# EAGLE board FM-Radio-Receiver-1.5V (EAGLE 7.2.0)
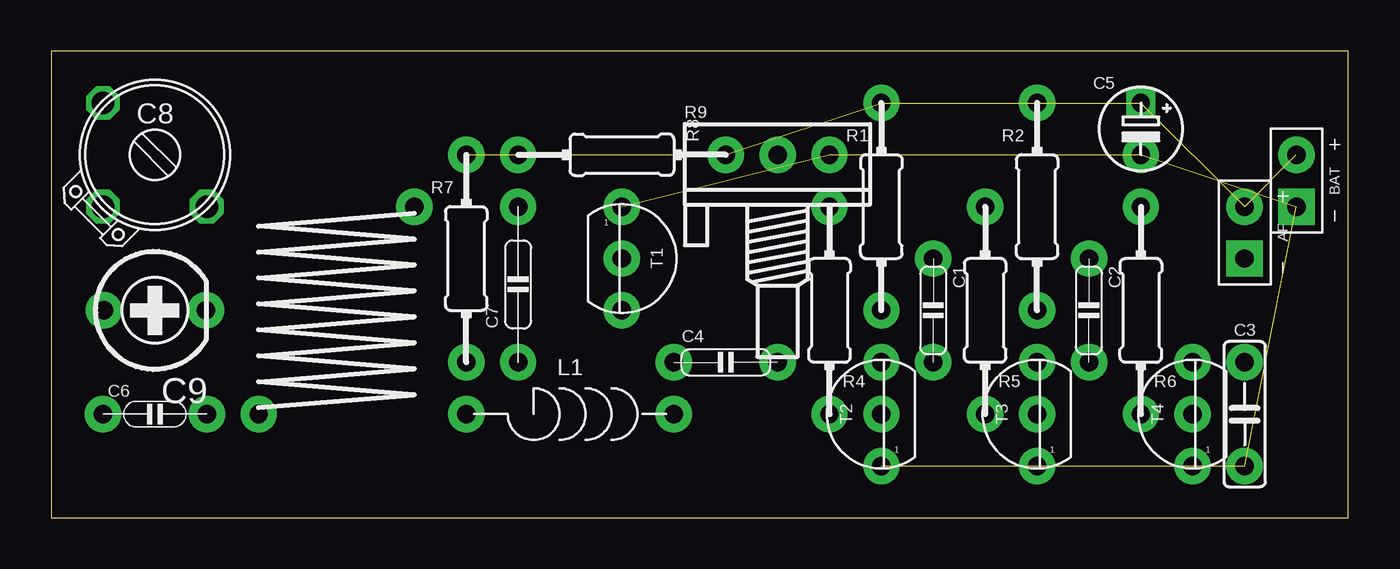
[diagram p0: board, top side]
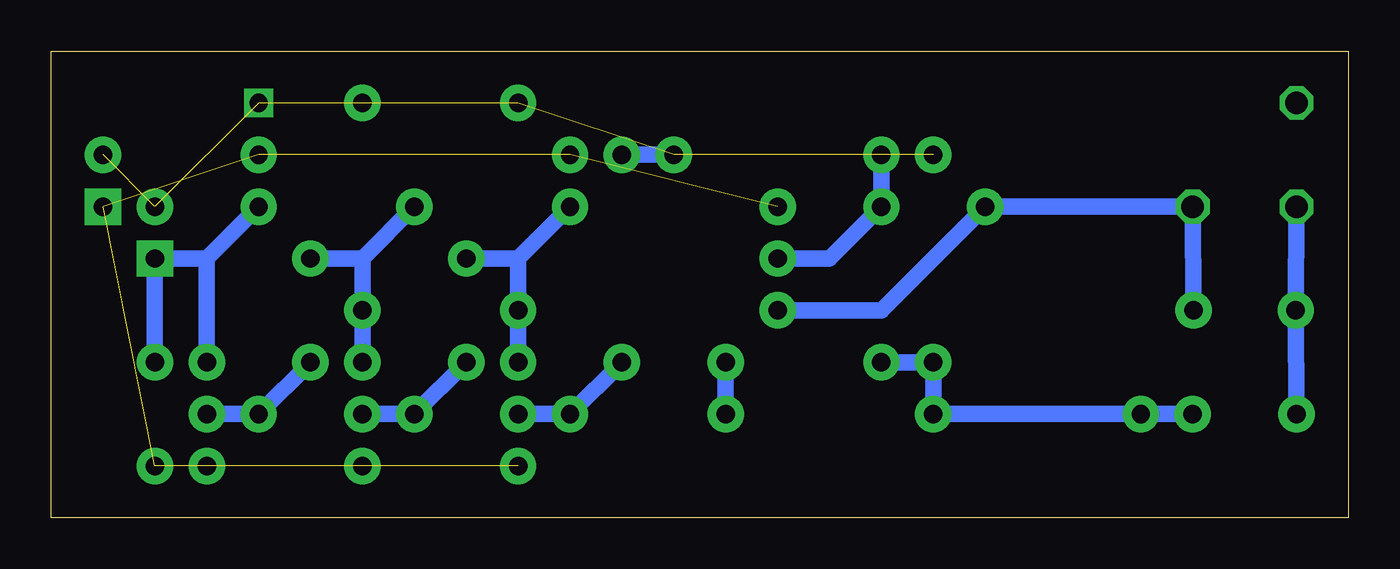
[diagram p1: board, bottom side, seen from below]

Size 63.5 x 22.86 mm. Coordinates in mm from the lower left corner, seen from the top.
Outline: 0,0 63.5,0 63.5,22.86 0,22.86 0,0
Copper layers (1*16): Top 0.035mm / dielectric 1.5mm / Bottom 0.035mm
Design rules "default": minimum track width 10mil, minimum drill 24mil, track to track 8mil, track to pad 8mil, pad to pad 8mil, via to via 8mil, smd to smd 8mil, copper to edge 40mil, drill to drill 8mil, minimum pad ring 10mil, minimum via ring 8mil, stop-mask expansion 4mil, vias tented up to drill 0mil, thermal gap 10mil

## Footprints (pad centres in the part's own frame; a part is rotated, then mirrored left to right if it is on the bottom)
SPAD+- = drill 0.9 pad 1.778 square: 1 0,-1.27 | drill 0.9 pad 1.778: 2 0,1.27
C050-020X044 = drill 0.9 pad 1.778: 1 -2.54,0; 2 2.54,0
C050-025X060 = drill 0.9 pad 1.778: 1 0,2.54; 2 0,-2.54
E2.5-4/V = drill 0.9 square: + 0,1.27 | drill 0.9 pad 1.778: - 0,-1.27
C050-020X036 = drill 0.9 pad 1.778: 1 -2.54,0; 2 2.54,0
C075-020X044 = drill 0.9 pad 1.778: 1 -2.54,0; 2 5.08,0
TRIM-2222-808 = drill 1.1 octagon: 1 -2.54,2.54; 2 -2.54,-2.54; 3 2.54,-2.54
CTRIMTZ03 = drill 0.9 pad 1.778: 1 0,2.5; 2 0,-2.5
L-03/10 = drill 0.9 pad 1.778: 1 5.08,0; 2 -5.08,0
L-10/10Y = drill 0.9 pad 1.778: P$1 5.08,2.54; P$2 -2.54,-7.62
0204/10-V = drill 0.9 pad 1.778: 1 0,5.08; 2 0,-5.08
POT = drill 0.9 pad 1.778: A -2.54,0; E 2.54,0; S 0,0
TO92 = drill 0.9 pad 1.778: 1 0,2.54; 2 0,0; 3 0,-2.54

## Placement (x,y rotation side)
AF  SPAD+-+-  [SPAD+-]  58.42,13.97 0 top
BAT  SPAD+-+-  [SPAD+-]  60.96,16.51 0 top
C1  33nF  [C050-020X044]  43.18,10.16 270 top
C2  100nF  [C050-020X044]  50.8,10.16 270 top
C3  10nF  [C050-025X060]  58.42,5.08 0 top
C4  10nF  [C050-020X044]  33.02,7.62 0 top
C5  100μF  [E2.5-4/V]  53.34,19.05 0 top
C6  22pF  [C050-020X036]  5.08,5.08 0 top
C7  100nF  [C075-020X044]  22.86,10.16 90 top
C8  20pF  [TRIM-2222-808]  5.08,17.78 0 top
C9  5pF  [CTRIMTZ03]  5.08,10.16 90 top
L1  2.2μH  [L-03/10]  25.4,5.08 0 top
L2  0.2μH  [L-10/10Y]  12.7,12.7 0 top
R1  4.7kΩ  [0204/10-V]  40.64,15.24 0 top
R2  4.7kΩ  [0204/10-V]  48.26,15.24 0 top
R4  1MΩ  [0204/10-V]  38.1,10.16 180 top
R5  1MΩ  [0204/10-V]  45.72,10.16 180 top
R6  56kΩ  [0204/10-V]  53.34,10.16 180 top
R7  10kΩ  [0204/10-V]  20.32,12.7 0 top
R8  470kΩ  [0204/10-V]  27.94,17.78 270 top
R9  10kΩ  [POT]  35.56,17.78 0 top
T1  2N2222  [TO92]  27.94,12.7 0 top
T2  2N2222  [TO92]  40.64,5.08 180 top
T3  2N2222  [TO92]  48.26,5.08 180 top
T4  2N2222  [TO92]  55.88,5.08 180 top

## Library data of the parts
AF BAT = pad
C1-C7 = c
C8 C9 = cap-trim
L1 L2 = l
R1 R2 R4-R9 = r
T1-T4 = t

## Nets
BASE: C7.2 R8.2 T1.2
BIAS: R8.1 R9.S
CAP: C6.1 C8.2 C9.1
COIL: C6.2 C7.1 L1.2 L2.P$2 R7.2
COLL: C8.3 C9.2 L2.P$1 T1.3
GND: BAT.1 C3.2 C5.- R9.E T1.1 T2.1 T3.1 T4.1
N$1: C1.2 R5.1 T3.2
N$2: C2.1 R2.2 R5.2 T3.3
N$3: C1.1 R1.2 R4.2 T2.3
N$4: C2.2 R6.1 T4.2
N$5: AF.1 C3.1 R6.2 T4.3
N$7: C4.2 R4.1 T2.2
N$8: C4.1 L1.1
VCC: AF.2 BAT.2 C5.+ R1.1 R2.1 R7.1 R9.A

## Tracks (layer width: path | path; a pad name or v marks a point on that pad's centre or on a via)
BASE
  Bottom 0.813: T1.2 25.4,12.7 C7.2 R8.2
BIAS
  Bottom 0.813: R9.S R8.1
CAP
  Bottom 0.813: C8.2 C9.1 C6.1
COIL
  Bottom 0.813: C7.1 R7.2 L1.2 C6.2 L2.P$2
COLL
  Bottom 0.813: T1.3 22.86,10.16 L2.P$1 C8.3 C9.2
GND  (7 unrouted)
N$1
  Bottom 0.813: C1.2 R5.1 T3.2
N$2
  Bottom 0.813: C2.1 48.26,12.7 | 48.26,12.7 R2.2 T3.3 | 48.26,12.7 R5.2
N$3
  Bottom 0.813: 40.64,12.7 R4.2 | C1.1 40.64,12.7 | 40.64,12.7 R1.2 T2.3
N$4
  Bottom 0.813: C2.2 R6.1 T4.2
N$5
  Bottom 0.813: 55.88,12.7 R6.2 | T4.3 55.88,12.7 | C3.1 AF.1 | 58.42,8.89 AF.1 | 55.88,12.7 AF.1
N$7
  Bottom 0.813: C4.2 R4.1 T2.2
N$8
  Bottom 0.813: L1.1 C4.1
VCC  (6 unrouted)